# EAGLE board SparkFun_Main_Board_Double_v20-Panel (EAGLE 9.6.2), part 1 of 3
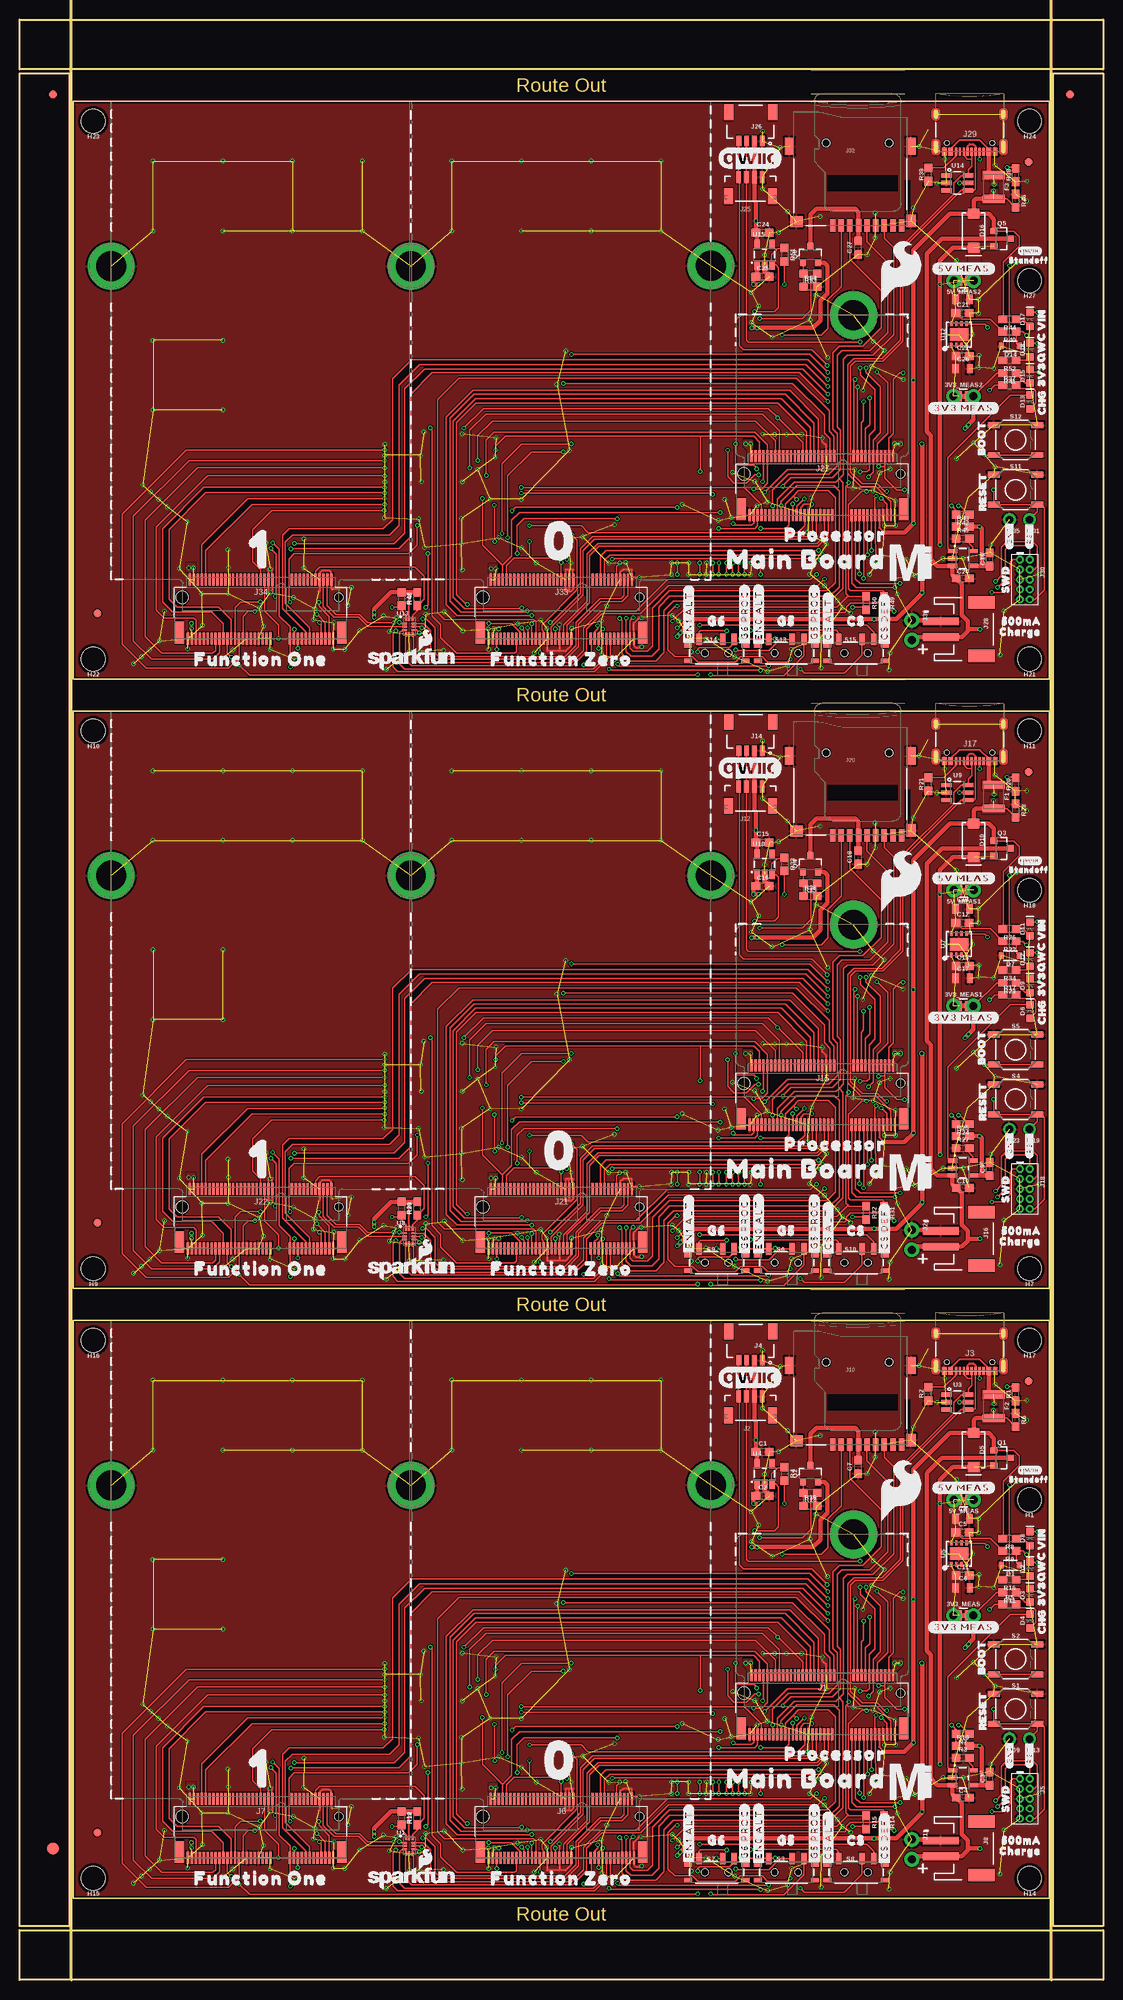
[diagram p0: board, top side]
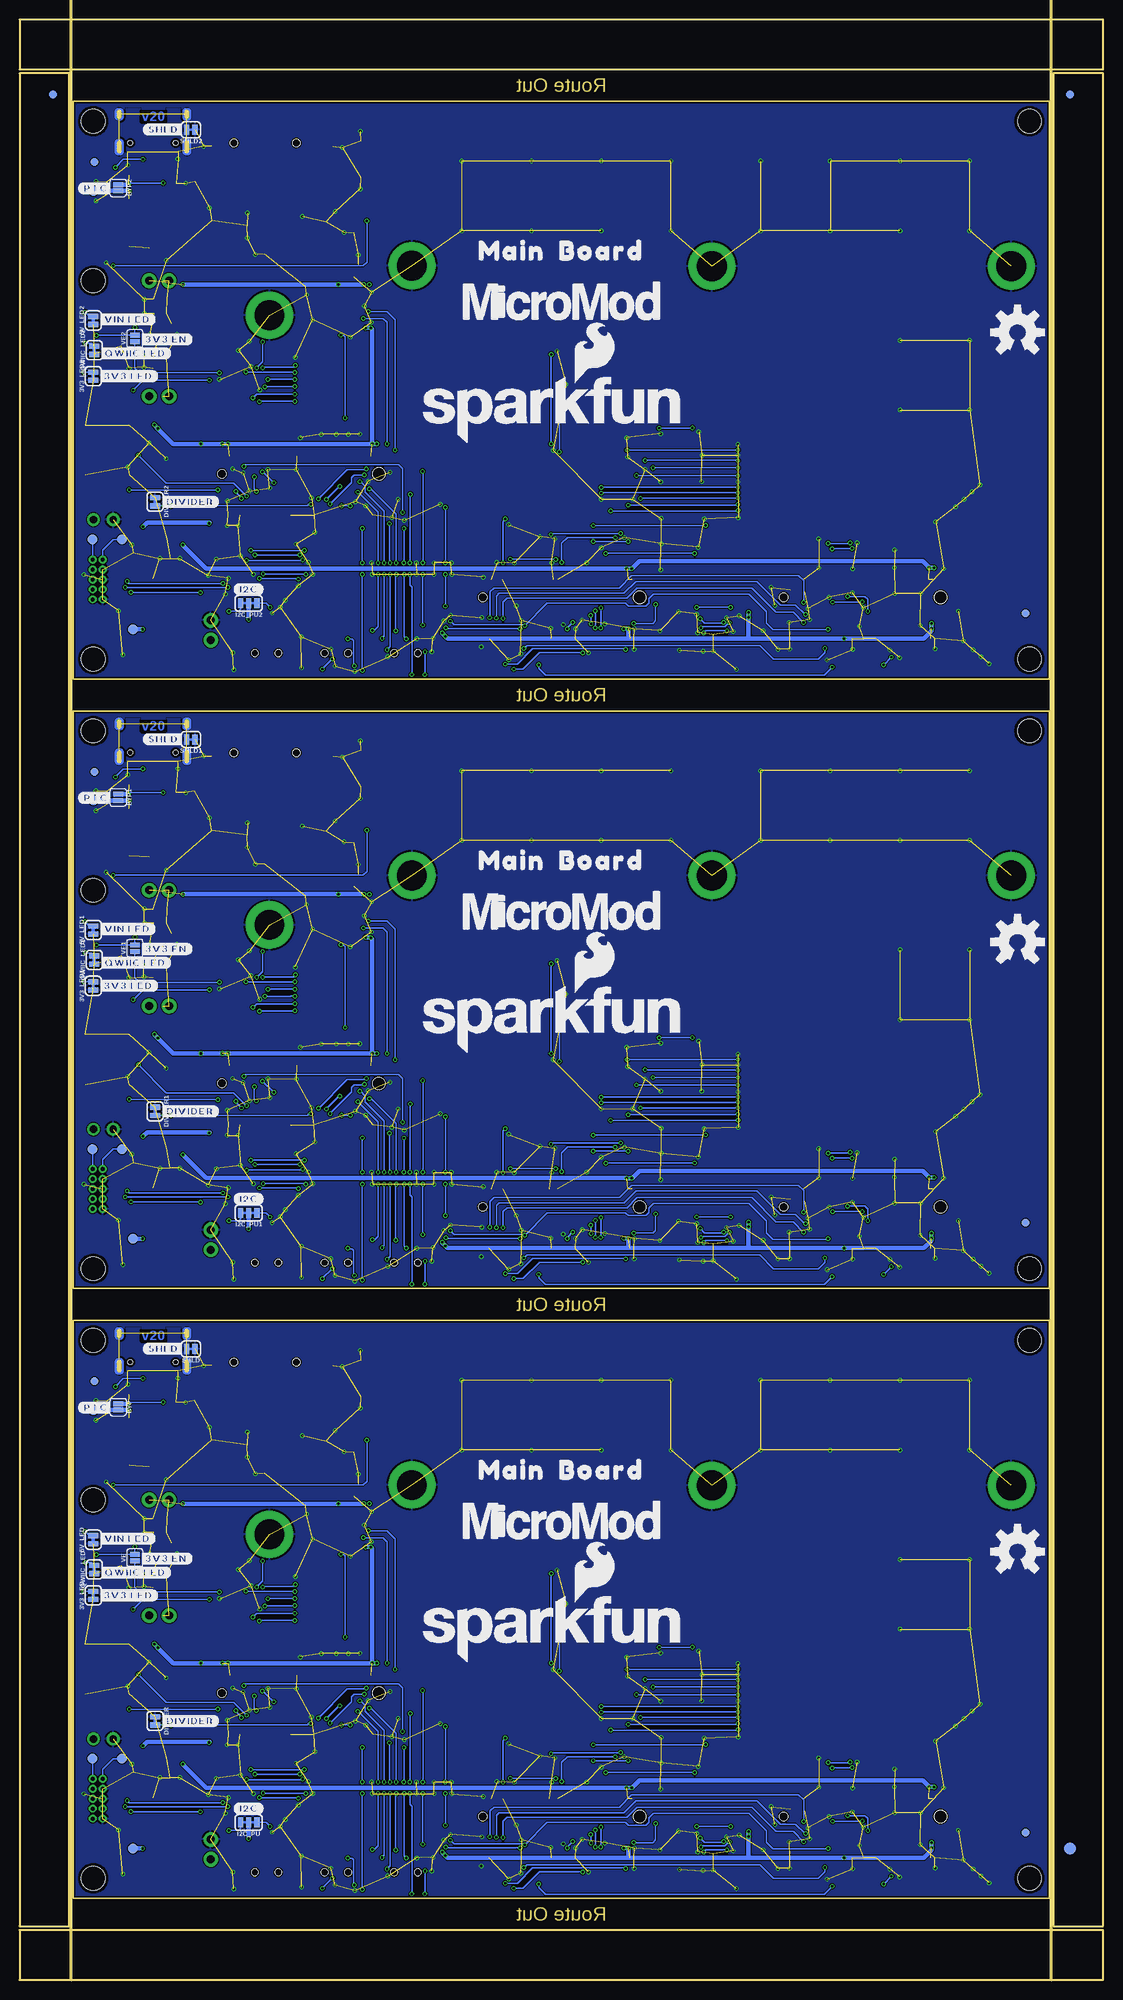
[diagram p1: board, bottom side, seen from below]

Size 138.18 x 249.94 mm. Coordinates in mm from the lower left corner, seen from the top.
Outline: 6.86,84.07 131.32,84.07 131.32,10.41 6.86,10.41 6.86,84.07
Outline: 6.86,161.8 131.32,161.8 131.32,88.14 6.86,88.14 6.86,161.8
Outline: 6.86,239.52 131.32,239.52 131.32,165.86 6.86,165.86 6.86,239.52
Outline: 0,6.35 138.18,6.35 138.18,0 0,0 0,6.35
Outline: 131.83,243.08 138.18,243.08 138.18,6.86 131.83,6.86 131.83,243.08
Outline: 0,249.94 138.18,249.94 138.18,243.59 0,243.59 0,249.94
Outline: 0,243.08 6.35,243.08 6.35,6.86 0,6.86 0,243.08
Copper layers (1*16): Top 0.035mm / dielectric 1.5mm / Bottom 0.035mm
Design rules "SparkFun_Main_Board_Double_v20": minimum track width 5mil, minimum drill 0.3mm, track to track 5mil, track to pad 5mil, pad to pad 5mil, via to via 5mil, smd to smd 5mil, copper to edge 7mil, drill to drill 7mil, minimum pad ring 5mil, minimum via ring 5mil, stop-mask expansion 2.5mil, vias tented up to drill 25mil, thermal gap 10mil
Net classes: 0 default: width 0.178 mm, drill 0.305 mm; 1 POWER: width 0.559 mm, drill 0.305 mm; 2 Diff pairs: width 0.203 mm, drill 0.305 mm
tRestrict: area 31.9,22.9 to 32.1,23.3; area 32.5,22.9 to 32.6,23.3; area 69.8,22.9 to 69.9,23.3; area 70.3,22.9 to 70.4,23.3; area 31.9,100.7 to 32.1,101; area 32.5,100.6 to 32.6,101; area 69.8,100.6 to 69.9,101; area 70.3,100.6 to 70.4,101; area 31.9,178.4 to 32.1,178.8; area 32.5,178.4 to 32.6,178.7; area 69.8,178.4 to 69.9,178.7; area 70.3,178.4 to 70.4,178.7
Milling: 2 lines

## Footprints (pad centres in the part's own frame; a part is rotated, then mirrored left to right if it is on the bottom)
SMT-JUMPER_2_NC_TRACE_SILK = smd 0.66 x 1.27: 1 -0.521,0; 2 0.521,0
COMBO-JUMPER_2_NC_TRACE = smd 0.635 x 1.27: 1 -0.508,0; 2 0.508,0 | drill 1.016 pad 1.88: 3 -1.27,0; 4 1.27,0
SMT-JUMPER_2_NO_SILK = smd 0.635 x 1.27: 1 -0.406,0; 2 0.406,0
0603 = smd 1.1 x 1: 1 -0.85,0; 2 0.85,0
0805 = smd 0.8 x 1.2: 1 -0.9,0; 2 0.9,0
SOD-323 = smd 0.63 x 0.83: A 1.15,0; C -1.15,0
LED-0603 = smd 1 x 1: A -0.877,0; C 0.877,0
SMA-DIODE = smd 1.27 x 1.47: A -2.15,0; C 2.15,0
FIDUCIAL-1X2 = smd 1 x 1: 1 0,0
FIDUCIAL-1.5X3 = smd 1.5 x 1.5: 1 0,0
1210 = smd 1 x 2.8: 1 -1.5,0; 2 1.5,0
STAND-OFF-TIGHT = hole 3.048: 0,0
STAND-OFF-REFLOW-M2.5 = drill 3.8 pad 6: 1 0,0
SMT-JUMPER_3_2-NC_TRACE_SILK = smd 0.66 x 1.27: 1 -1.041,0; 2 0,0; 3 1.041,0
M.2-CONNECTOR-E = smd 0.3 x 1.55: 1 9.25,-5.275; 2 9,2.275; 3 8.75,-5.275; 4 8.5,2.275; 5 8.25,-5.275; 6 8,2.275; 7 7.75,-5.275; 8 7.5,2.275; 9 7.25,-5.275; 10 7,2.275; 11 6.75,-5.275; 12 6.5,2.275; 13 6.25,-5.275; 14 6,2.275; 15 5.75,-5.275; 16 5.5,2.275; 17 5.25,-5.275; 18 5,2.275; 19 4.75,-5.275; 20 4.5,2.275; 21 4.25,-5.275; 22 4,2.275; 23 3.75,-5.275; 32 1.5,2.275; 33 1.25,-5.275; 34 1,2.275; 35 0.75,-5.275; 36 0.5,2.275; 37 0.25,-5.275; 38 0,2.275; 39 -0.25,-5.275; 40 -0.5,2.275; 41 -0.75,-5.275; 42 -1,2.275; 43 -1.25,-5.275; 44 -1.5,2.275; 45 -1.75,-5.275; 46 -2,2.275; 47 -2.25,-5.275; 48 -2.5,2.275; 49 -2.75,-5.275; 50 -3,2.275; 51 -3.25,-5.275; 52 -3.5,2.275; 53 -3.75,-5.275; 54 -4,2.275; 55 -4.25,-5.275; 56 -4.5,2.275; 57 -4.75,-5.275; 58 -5,2.275; 59 -5.25,-5.275; 60 -5.5,2.275; 61 -5.75,-5.275; 62 -6,2.275; 63 -6.25,-5.275; 64 -6.5,2.275; 65 -6.75,-5.275; 66 -7,2.275; 67 -7.25,-5.275; 68 -7.5,2.275; 69 -7.75,-5.275; 70 -8,2.275; 71 -8.25,-5.275; 72 -8.5,2.275; 73 -8.75,-5.275; 74 -9,2.275; 75 -9.25,-5.275 | smd 1.2 x 2.75: A1 10.35,-4.5; A2 -10.35,-4.5 | hole 1.1: 10,0 | hole 1.6: -10,0
JST04_1MM_VERT = smd 0.6 x 1.55: 1 -1.478,0.775; 2 -0.478,0.775; 3 0.522,0.775; 4 1.522,0.775 | smd 1.2 x 2: NC1 -2.778,3.2; NC2 2.822,3.2
USB-C-16P-2LAYER-PADS = smd 0.3 x 1: A5 -1.25,-0.34; A6 -0.25,-0.34; A7 0.25,-0.34; A8 1.25,-0.34; B5 1.75,-0.34; B6 0.75,-0.34; B7 -0.75,-0.34; B8 -1.75,-0.34 | smd 0.6 x 1: GND -3.225,-0.34; GND2 3.225,-0.34; VBUS1 -2.45,-0.34; VBUS2 2.45,-0.34 | drill 0.4 pad 0.6 long: SHLD1 -4.318,-0.915; SHLD2 4.318,-0.915; SHLD3 -4.318,-5.095; SHLD4 4.318,-5.095 | hole 0.65: -2.89,-1.445; 2.89,-1.445
JST04_1MM_RA = smd 0.6 x 1.35: 1 -1.5,0; 2 -0.5,0; 3 0.5,0; 4 1.5,0 | smd 1.2 x 2: NC1 2.8,-3.675; NC2 -2.8,-3.675
2X5-PTH-1.27MM = drill 0.508 pad 1: 1 -2.54,-0.635; 2 -2.54,0.635; 3 -1.27,-0.635; 4 -1.27,0.635; 5 0,-0.635; 6 0,0.635; 7 1.27,-0.635; 8 1.27,0.635; 9 2.54,-0.635; 10 2.54,0.635
M.2-CONNECTOR-E-FUNCTION-STANDARD = smd 0.3 x 1.55: 1 9.25,-5.275; 2 9,2.275; 3 8.75,-5.275; 4 8.5,2.275; 5 8.25,-5.275; 6 8,2.275; 7 7.75,-5.275; 8 7.5,2.275; 9 7.25,-5.275; 10 7,2.275; 11 6.75,-5.275; 12 6.5,2.275; 13 6.25,-5.275; 14 6,2.275; 15 5.75,-5.275; 16 5.5,2.275; 17 5.25,-5.275; 18 5,2.275; 19 4.75,-5.275; 20 4.5,2.275; 21 4.25,-5.275; 22 4,2.275; 23 3.75,-5.275; 32 1.5,2.275; 33 1.25,-5.275; 34 1,2.275; 35 0.75,-5.275; 36 0.5,2.275; 37 0.25,-5.275; 38 0,2.275; 39 -0.25,-5.275; 40 -0.5,2.275; 41 -0.75,-5.275; 42 -1,2.275; 43 -1.25,-5.275; 44 -1.5,2.275; 45 -1.75,-5.275; 46 -2,2.275; 47 -2.25,-5.275; 48 -2.5,2.275; 49 -2.75,-5.275; 50 -3,2.275; 51 -3.25,-5.275; 52 -3.5,2.275; 53 -3.75,-5.275; 54 -4,2.275; 55 -4.25,-5.275; 56 -4.5,2.275; 57 -4.75,-5.275; 58 -5,2.275; 59 -5.25,-5.275; 60 -5.5,2.275; 61 -5.75,-5.275; 62 -6,2.275; 63 -6.25,-5.275; 64 -6.5,2.275; 65 -6.75,-5.275; 66 -7,2.275; 67 -7.25,-5.275; 68 -7.5,2.275; 69 -7.75,-5.275; 70 -8,2.275; 71 -8.25,-5.275; 72 -8.5,2.275; 73 -8.75,-5.275; 74 -9,2.275; 75 -9.25,-5.275 | smd 1.2 x 2.75: A1 10.35,-4.5; A2 -10.35,-4.5 | hole 1.1: 10,0 | hole 1.6: -10,0
JST-2-SMD = smd 1 x 4.6: 1 -1,-3.7; 2 1,-3.7 | smd 1.6 x 3.4: NC1 -3.4,1.5; NC2 3.4,1.5
1X01_NO_SILK = drill 0.95 pad 1.6: 1 0,0
MICROSD-EXTERNALPIN = smd 0.7 x 1.6: 1 2.25,10.5; 2 1.15,10.5; 3 0.05,10.5; 4 -1.05,10.5; 5 -2.15,10.5; 6 -3.25,10.5; 7 -4.35,10.5; 8 -5.45,10.5; 9 -6.55,10.5 | smd 1.2 x 1.6: 10 -7.75,9.9 | smd 1.2 x 2.2: 11 -7.75,0.4; 12 7.75,0.4 | smd 1.6 x 1.4: 13 6.85,10 | hole 1: 3.05,0; -4.95,0
1X02_NO_SILK = drill 1.016 pad 1.88: 1 0,0; 2 2.54,0
SOT23-3 = smd 0.8 x 0.9: 1 -0.95,-1; 2 0.95,-1; 3 0,1.1
TACTILE_SWITCH_SMD_5.2MM = smd 1.524 x 0.762: 1 -2.794,1.905; 2 2.794,1.905; 3 -2.794,-1.905; 4 2.794,-1.905
SWITCH_SPST_SMD_A = smd 0.7 x 1.5: 1 -2.25,-1.75; 2 -0.75,-1.75; 3 2.25,-1.75 | smd 1 x 0.6: GND1 -3.65,1; GND3 3.65,1 | smd 1 x 0.8: GND2 -3.65,-1.1; GND4 3.65,-1.1 | hole 0.9: -1.5,0; 1.5,0
PAD.03X.05 = smd 1.27 x 1.27: 1 0,0
STG3856 = smd 0.6 x 0.25: P1 -0.59,0.41; P2 -0.59,0.01; P3 -0.59,-0.39; P7 0.58,-0.39; P8 0.58,0.01; P9 0.58,0.41 | smd 0.25 x 0.6: P4 -0.42,-0.96; P5 -0.02,-0.96; P6 0.38,-0.96; P10 0.38,1.01; P11 -0.02,1.01; P12 -0.42,1.01
SOT23-5 = smd 0.55 x 1.2: 1 -0.95,-1.3; 2 0,-1.3; 3 0.95,-1.3; 4 0.95,1.3; 5 -0.95,1.3
SOT-23-6 = smd 0.55 x 1.35: 1 -0.95,-1.375; 2 0,-1.375; 3 0.95,-1.375; 4 0.95,1.375; 5 0,1.375; 6 -0.95,1.375
SOT25 = smd 0.7 x 1.2: 1 -0.95,-1.3; 2 0,-1.3; 3 0.95,-1.3; 4 0.95,1.3; 5 -0.95,1.3
UDFN-8 = smd 0.3 x 0.65: 1 -0.975,-1.375; 2 -0.325,-1.375; 3 0.325,-1.375; 4 0.975,-1.375; 5 0.975,1.375; 6 0.325,1.375; 7 -0.325,1.375; 8 -0.975,1.375 | smd 2.35 x 1.6: EP 0,0

## Placement (x,y rotation side)
3V3_LED  JUMPER-SMT_2_NC_TRACE_SILK  [SMT-JUMPER_2_NC_TRACE_SILK]  128.78,49.02 90 bottom
3V3_LED1  JUMPER-SMT_2_NC_TRACE_SILK  [SMT-JUMPER_2_NC_TRACE_SILK]  128.78,126.75 90 bottom
3V3_LED2  JUMPER-SMT_2_NC_TRACE_SILK  [SMT-JUMPER_2_NC_TRACE_SILK]  128.78,204.47 90 bottom
3V3_MEAS  JUMPER-COMBO_2_NC_TRACE  [COMBO-JUMPER_2_NC_TRACE]  120.37,46.46 0 top
3V3_MEAS1  JUMPER-COMBO_2_NC_TRACE  [COMBO-JUMPER_2_NC_TRACE]  120.37,124.18 0 top
3V3_MEAS2  JUMPER-COMBO_2_NC_TRACE  [COMBO-JUMPER_2_NC_TRACE]  120.37,201.9 0 top
5V_LED  JUMPER-SMT_2_NC_TRACE_SILK  [SMT-JUMPER_2_NC_TRACE_SILK]  128.78,56.13 90 bottom
5V_LED1  JUMPER-SMT_2_NC_TRACE_SILK  [SMT-JUMPER_2_NC_TRACE_SILK]  128.78,133.86 90 bottom
5V_LED2  JUMPER-SMT_2_NC_TRACE_SILK  [SMT-JUMPER_2_NC_TRACE_SILK]  128.78,211.58 90 bottom
5V_MEAS  JUMPER-COMBO_2_NC_TRACE  [COMBO-JUMPER_2_NC_TRACE]  120.4,61.21 180 top
5V_MEAS1  JUMPER-COMBO_2_NC_TRACE  [COMBO-JUMPER_2_NC_TRACE]  120.4,138.94 180 top
5V_MEAS2  JUMPER-COMBO_2_NC_TRACE  [COMBO-JUMPER_2_NC_TRACE]  120.4,216.66 180 top
BYP  JUMPER-SMT_2_NO_SILK  [SMT-JUMPER_2_NO_SILK]  125.63,73.05 270 bottom
BYP1  JUMPER-SMT_2_NO_SILK  [SMT-JUMPER_2_NO_SILK]  125.63,150.77 270 bottom
BYP2  JUMPER-SMT_2_NO_SILK  [SMT-JUMPER_2_NO_SILK]  125.63,228.5 270 bottom
C1  1.0uF  [0603]  94.74,67.31 0 top
C2  1.0uF  [0603]  94.74,61.72 0 top
C3  4.7uF  [0603]  123.7,25.65 90 top
C4  4.7uF  [0603]  120.27,23.24 0 top
C5  0.1uF  [0603]  120.24,57.05 0 top
C6  10uF  [0805]  120.27,49.99 0 top
C7  10uF  [0603]  106.93,65.41 90 top
C8  10uF  [0805]  120.24,58.83 0 top
C9  4.7uF  [0603]  123.7,103.38 90 top
C10  4.7uF  [0603]  120.27,100.97 0 top
C11  4.7uF  [0603]  120.27,51.56 0 top
C12  0.1uF  [0603]  120.24,134.77 0 top
C13  4.7uF  [0603]  120.27,129.29 0 top
C14  10uF  [0805]  120.24,136.55 0 top
C15  1.0uF  [0603]  94.74,145.03 0 top
C16  1.0uF  [0603]  94.74,139.45 0 top
C17  10uF  [0805]  120.27,127.71 0 top
C18  10uF  [0603]  106.93,143.13 90 top
C19  4.7uF  [0603]  123.7,181.1 90 top
C20  4.7uF  [0603]  120.27,178.69 0 top
C21  0.1uF  [0603]  120.24,212.5 0 top
C22  4.7uF  [0603]  120.27,207.01 0 top
C23  10uF  [0805]  120.24,214.27 0 top
C24  1.0uF  [0603]  94.74,222.76 0 top
C25  1.0uF  [0603]  94.74,217.17 0 top
C26  10uF  [0805]  120.27,205.44 0 top
C27  10uF  [0603]  106.93,220.85 90 top
D1  3.3V  [SOD-323]  126.34,52.86 180 top
D2  RED  [LED-0603]  128.85,52.36 90 top
D3  RED  [LED-0603]  128.85,49.02 90 top
D4  Yellow  [LED-0603]  128.85,45.76 90 top
D5  3A/40V/500mV  [SMA-DIODE]  121.67,67.56 270 top
D6  Yellow  [LED-0603]  128.85,123.48 90 top
D7  3.3V  [SOD-323]  126.34,130.58 180 top
D8  RED  [LED-0603]  128.85,56.26 90 top
D9  RED  [LED-0603]  128.85,126.74 90 top
D10  3A/40V/500mV  [SMA-DIODE]  121.67,145.29 270 top
D11  RED  [LED-0603]  128.85,133.98 90 top
D12  RED  [LED-0603]  128.85,130.09 90 top
D13  Yellow  [LED-0603]  128.85,201.21 90 top
D14  3.3V  [SOD-323]  126.34,208.31 180 top
D15  RED  [LED-0603]  128.85,204.47 90 top
D16  3A/40V/500mV  [SMA-DIODE]  121.67,223.01 270 top
D17  RED  [LED-0603]  128.85,211.71 90 top
D18  RED  [LED-0603]  128.85,207.81 90 top
DIVIDER  JUMPER-SMT_2_NC_TRACE_SILK  [SMT-JUMPER_2_NC_TRACE_SILK]  120.9,33.02 270 bottom
DIVIDER1  JUMPER-SMT_2_NC_TRACE_SILK  [SMT-JUMPER_2_NC_TRACE_SILK]  120.9,110.74 270 bottom
DIVIDER2  JUMPER-SMT_2_NC_TRACE_SILK  [SMT-JUMPER_2_NC_TRACE_SILK]  120.9,188.47 270 bottom
E$1  [FIDUCIAL-1X2]  4.23,240.41 0 top
E$2  [FIDUCIAL-1X2]  4.23,240.41 0 bottom
E$3  [FIDUCIAL-1X2]  133.94,240.41 0 top
E$4  [FIDUCIAL-1X2]  133.94,240.41 0 bottom
E$5  [FIDUCIAL-1.5X3]  4.23,16.76 0 top
E$6  [FIDUCIAL-1.5X3]  4.23,16.76 0 bottom
F1  6V/2A  [1210]  124.21,150.88 270 top
F2  6V/2A  [1210]  124.21,73.15 270 top
F3  6V/2A  [1210]  124.21,228.6 270 top
FD1  FIDUCIAL1X2  [FIDUCIAL-1X2]  9.91,18.8 180 bottom
FD2  FIDUCIAL1X2  [FIDUCIAL-1X2]  9.91,18.8 180 top
FD3  FIDUCIAL1X2  [FIDUCIAL-1X2]  128.65,76.33 270 top
FD4  FIDUCIAL1X2  [FIDUCIAL-1X2]  128.65,76.33 90 bottom
FD5  FIDUCIAL1X2  [FIDUCIAL-1X2]  9.91,96.52 180 bottom
FD6  FIDUCIAL1X2  [FIDUCIAL-1X2]  9.91,96.52 180 top
FD7  FIDUCIAL1X2  [FIDUCIAL-1X2]  128.65,154.05 270 top
FD8  FIDUCIAL1X2  [FIDUCIAL-1X2]  128.65,154.05 90 bottom
FD9  FIDUCIAL1X2  [FIDUCIAL-1X2]  9.91,174.24 180 bottom
FD10  FIDUCIAL1X2  [FIDUCIAL-1X2]  9.91,174.24 180 top
FD11  FIDUCIAL1X2  [FIDUCIAL-1X2]  128.65,231.77 270 top
FD12  FIDUCIAL1X2  [FIDUCIAL-1X2]  128.65,231.77 90 bottom
H1  STAND-OFFTIGHT  [STAND-OFF-TIGHT]  128.78,61.21 180 top
H2  STAND-OFF-REFLOW-M2.5_2.5MM_TALL  [STAND-OFF-REFLOW-M2.5]  49.89,63.07 180 top
H3  STAND-OFF-REFLOW-M2.5_2.5MM_TALL  [STAND-OFF-REFLOW-M2.5]  11.7,63.07 90 top
H4  STAND-OFF-REFLOW-M2.5_2.5MM_TALL  [STAND-OFF-REFLOW-M2.5]  88.15,63.09 90 top
H5  STAND-OFF-REFLOW-M2.5_2.5MM_TALL  [STAND-OFF-REFLOW-M2.5]  11.7,140.79 90 top
H6  STAND-OFF-REFLOW-M2.5_2.5MM_TALL  [STAND-OFF-REFLOW-M2.5]  106.32,134.52 90 top
H7  STAND-OFFTIGHT  [STAND-OFF-TIGHT]  128.78,90.68 180 top
H8  STAND-OFF-REFLOW-M2.5_2.5MM_TALL  [STAND-OFF-REFLOW-M2.5]  106.32,56.8 90 top
H9  STAND-OFFTIGHT  [STAND-OFF-TIGHT]  9.4,90.68 180 top
H10  STAND-OFFTIGHT  [STAND-OFF-TIGHT]  9.4,159.26 180 top
H11  STAND-OFFTIGHT  [STAND-OFF-TIGHT]  128.78,159.26 180 top
H12  STAND-OFF-REFLOW-M2.5_2.5MM_TALL  [STAND-OFF-REFLOW-M2.5]  49.89,140.79 180 top
H13  STAND-OFF-REFLOW-M2.5_2.5MM_TALL  [STAND-OFF-REFLOW-M2.5]  88.15,140.82 90 top
H14  STAND-OFFTIGHT  [STAND-OFF-TIGHT]  128.78,12.95 180 top
H15  STAND-OFFTIGHT  [STAND-OFF-TIGHT]  9.4,12.95 180 top
H16  STAND-OFFTIGHT  [STAND-OFF-TIGHT]  9.4,81.53 180 top
H17  STAND-OFFTIGHT  [STAND-OFF-TIGHT]  128.78,81.53 180 top
H18  STAND-OFFTIGHT  [STAND-OFF-TIGHT]  128.78,138.94 180 top
H19  STAND-OFF-REFLOW-M2.5_2.5MM_TALL  [STAND-OFF-REFLOW-M2.5]  11.7,218.52 90 top
H20  STAND-OFF-REFLOW-M2.5_2.5MM_TALL  [STAND-OFF-REFLOW-M2.5]  106.32,212.25 90 top
H21  STAND-OFFTIGHT  [STAND-OFF-TIGHT]  128.78,168.4 180 top
H22  STAND-OFFTIGHT  [STAND-OFF-TIGHT]  9.4,168.4 180 top
H23  STAND-OFFTIGHT  [STAND-OFF-TIGHT]  9.4,236.98 180 top
H24  STAND-OFFTIGHT  [STAND-OFF-TIGHT]  128.78,236.98 180 top
H25  STAND-OFF-REFLOW-M2.5_2.5MM_TALL  [STAND-OFF-REFLOW-M2.5]  49.89,218.52 180 top
H26  STAND-OFF-REFLOW-M2.5_2.5MM_TALL  [STAND-OFF-REFLOW-M2.5]  88.15,218.54 90 top
H27  STAND-OFFTIGHT  [STAND-OFF-TIGHT]  128.78,216.66 180 top
I2C_PU  JUMPER-SMT_3_2-NC_TRACE_SILK  [SMT-JUMPER_3_2-NC_TRACE_SILK]  108.97,20.07 180 bottom
I2C_PU1  JUMPER-SMT_3_2-NC_TRACE_SILK  [SMT-JUMPER_3_2-NC_TRACE_SILK]  108.97,97.79 180 bottom
I2C_PU2  JUMPER-SMT_3_2-NC_TRACE_SILK  [SMT-JUMPER_3_2-NC_TRACE_SILK]  108.97,175.51 180 bottom
J1  MICROMOD-2222-C  [M.2-CONNECTOR-E]  102.36,36.58 0 top
J2  Vertical Qwiic Connector  [JST04_1MM_VERT]  93.22,75.18 180 top
J3  [USB-C-16P-2LAYER-PADS]  121.16,77.32 180 top
J4  QWIIC_RIGHT_ANGLE  [JST04_1MM_RA]  93.22,78.99 180 top
J5  CORTEX_JTAG_DEBUG_MINIMUM_PTH  [2X5-PTH-1.27MM]  128.21,23.11 270 top
J6  MICROMOD_FUNCTION_MAIN  [M.2-CONNECTOR-E-FUNCTION-STANDARD]  69.09,20.83 0 top
J7  MICROMOD_FUNCTION_MAIN  [M.2-CONNECTOR-E-FUNCTION-STANDARD]  30.73,20.83 0 top
J8  [JST-2-SMD]  121.16,16.76 270 top
J9  [1X01_NO_SILK]  126.24,30.73 180 top
J10  MICRO-SD-PUSH-PUSH-EXT-PIN  [MICROSD-EXTERNALPIN]  105.92,78.74 180 top
J11  [1X02_NO_SILK]  113.79,17.91 270 top
J12  Vertical Qwiic Connector  [JST04_1MM_VERT]  93.22,152.91 180 top
J13  [1X01_NO_SILK]  128.78,30.73 180 top
J14  QWIIC_RIGHT_ANGLE  [JST04_1MM_RA]  93.22,156.72 180 top
J15  MICROMOD-2222-C  [M.2-CONNECTOR-E]  102.36,114.3 0 top
J16  [JST-2-SMD]  121.16,94.49 270 top
J17  [USB-C-16P-2LAYER-PADS]  121.16,155.04 180 top
J18  CORTEX_JTAG_DEBUG_MINIMUM_PTH  [2X5-PTH-1.27MM]  128.21,100.83 270 top
J19  [1X01_NO_SILK]  128.78,108.46 180 top
J20  MICRO-SD-PUSH-PUSH-EXT-PIN  [MICROSD-EXTERNALPIN]  105.92,156.46 180 top
J21  MICROMOD_FUNCTION_MAIN  [M.2-CONNECTOR-E-FUNCTION-STANDARD]  69.09,98.55 0 top
J22  MICROMOD_FUNCTION_MAIN  [M.2-CONNECTOR-E-FUNCTION-STANDARD]  30.73,98.55 0 top
J23  [1X01_NO_SILK]  126.24,108.46 180 top
J24  [1X02_NO_SILK]  113.79,95.63 270 top
J25  Vertical Qwiic Connector  [JST04_1MM_VERT]  93.22,230.63 180 top
J26  QWIIC_RIGHT_ANGLE  [JST04_1MM_RA]  93.22,234.44 180 top
J27  MICROMOD-2222-C  [M.2-CONNECTOR-E]  102.36,192.02 0 top
J28  [JST-2-SMD]  121.16,172.21 270 top
J29  [USB-C-16P-2LAYER-PADS]  121.16,232.77 180 top
J30  CORTEX_JTAG_DEBUG_MINIMUM_PTH  [2X5-PTH-1.27MM]  128.21,178.56 270 top
J31  [1X01_NO_SILK]  128.78,186.18 180 top
J32  MICRO-SD-PUSH-PUSH-EXT-PIN  [MICROSD-EXTERNALPIN]  105.92,234.19 180 top
J33  MICROMOD_FUNCTION_MAIN  [M.2-CONNECTOR-E-FUNCTION-STANDARD]  69.09,176.28 0 top
J34  MICROMOD_FUNCTION_MAIN  [M.2-CONNECTOR-E-FUNCTION-STANDARD]  30.73,176.28 0 top
J35  [1X01_NO_SILK]  126.24,186.18 180 top
J36  [1X02_NO_SILK]  113.79,173.35 270 top
LOGO1  QWIIC_LOGO_8MM  [QWIIC_8MM]  93.17,76.78 0 top
LOGO2  SFE_LOGO_NAME_FLAME.3_INCH  [SFE_LOGO_NAME_FLAME_.3]  70.36,44.7 0 bottom
LOGO3  OSHW-LOGOL  [OSHW-LOGO-L]  10.92,54.61 0 bottom
LOGO4  QWIIC_LOGO_8MM  [QWIIC_8MM]  93.17,154.51 0 top
LOGO5  SFE_LOGO_NAME_FLAME.3_INCH  [SFE_LOGO_NAME_FLAME_.3]  70.36,122.43 0 bottom
LOGO6  OSHW-LOGOL  [OSHW-LOGO-L]  10.92,132.33 0 bottom
LOGO7  QWIIC_LOGO_8MM  [QWIIC_8MM]  93.17,232.23 0 top
LOGO8  SFE_LOGO_NAME_FLAME.3_INCH  [SFE_LOGO_NAME_FLAME_.3]  70.36,200.15 0 bottom
LOGO9  OSHW-LOGOL  [OSHW-LOGO-L]  10.92,210.06 0 bottom
Q1  3.1A/30V/105mΩ  [SOT23-3]  125.22,66.55 270 top
Q2  20V/4.2A/52mΩ/1.4W  [SOT23-3]  100.84,64.52 0 top
Q3  3.1A/30V/105mΩ  [SOT23-3]  125.22,144.27 270 top
Q4  20V/4.2A/52mΩ/1.4W  [SOT23-3]  100.84,142.24 0 top
Q5  3.1A/30V/105mΩ  [SOT23-3]  125.22,222 270 top
Q6  20V/4.2A/52mΩ/1.4W  [SOT23-3]  100.84,219.96 0 top
QWIIC_LED  JUMPER-SMT_2_NC_TRACE_SILK  [SMT-JUMPER_2_NC_TRACE_SILK]  128.65,52.32 90 bottom
QWIIC_LED1  JUMPER-SMT_2_NC_TRACE_SILK  [SMT-JUMPER_2_NC_TRACE_SILK]  128.65,130.05 90 bottom
QWIIC_LED2  JUMPER-SMT_2_NC_TRACE_SILK  [SMT-JUMPER_2_NC_TRACE_SILK]  128.65,207.77 90 bottom
R1  5.1k  [0603]  127,74.68 90 top
R2  5.1k  [0603]  115.87,74.73 90 top
R3  2.0k  [0603]  120.27,28.32 0 top
R4  100k  [0603]  97.54,64.52 270 top
R5  4.7k  [0603]  126.24,47.88 0 top
R6  10k  [0603]  127,71.37 270 top
R7  10k  [0603]  120.27,31.37 180 top
R8  2.2k  [0603]  126.24,56.26 180 top
R9  100k  [0603]  126.24,54.7 180 top
R10  20k  [0603]  120.27,29.84 0 top
R11  1k  [0603]  126.24,49.4 180 top
R12  100k  [0603]  50.72,20.62 90 top
R13  100k  [0603]  48.69,20.62 270 top
R14  2.2k  [0603]  110.24,20.07 270 top
R15  2.2k  [0603]  107.95,20.07 270 top
R16  1k  [0603]  126.24,51.04 180 top
R17  4.7k  [0603]  126.24,125.6 0 top
R18  100  [0603]  100.84,62.09 180 top
R19  100k  [0603]  100.83,60.45 0 top
R20  5.1k  [0603]  127,152.4 90 top
R21  5.1k  [0603]  115.87,152.45 90 top
R22  100k  [0603]  126.24,132.42 180 top
R23  1k  [0603]  126.24,127.13 180 top
R24  10k  [0603]  120.27,109.09 180 top
R25  20k  [0603]  120.27,107.57 0 top
R26  2.2k  [0603]  126.24,133.98 180 top
R27  2.0k  [0603]  120.27,106.05 0 top
R28  10k  [0603]  127,149.1 270 top
R29  100k  [0603]  50.72,98.35 90 top
R30  100k  [0603]  48.69,98.35 270 top
R31  2.2k  [0603]  110.24,97.79 270 top
R32  2.2k  [0603]  107.95,97.79 270 top
R33  100k  [0603]  97.54,142.24 270 top
R34  1k  [0603]  126.24,128.76 180 top
R35  100  [0603]  100.84,139.81 180 top
R36  100k  [0603]  100.83,138.18 0 top
R37  4.7k  [0603]  126.24,203.33 0 top
R38  5.1k  [0603]  127,230.12 90 top
R39  5.1k  [0603]  115.87,230.17 90 top
R40  100k  [0603]  126.24,210.14 180 top
R41  1k  [0603]  126.24,204.85 180 top
R42  10k  [0603]  120.27,186.82 180 top
R43  20k  [0603]  120.27,185.29 0 top
R44  2.2k  [0603]  126.24,211.71 180 top
R45  2.0k  [0603]  120.27,183.77 0 top
R46  10k  [0603]  127,226.82 270 top
R47  100k  [0603]  50.72,176.07 90 top
R48  100k  [0603]  48.69,176.07 270 top
R49  2.2k  [0603]  110.24,175.51 270 top
R50  2.2k  [0603]  107.95,175.51 270 top
R51  100k  [0603]  97.54,219.96 270 top
R52  1k  [0603]  126.24,206.49 180 top
R53  100  [0603]  100.84,217.53 180 top
R54  100k  [0603]  100.83,215.9 0 top
S1  Reset  [TACTILE_SWITCH_SMD_5.2MM]  127,34.54 0 top
S2  BOOT  [TACTILE_SWITCH_SMD_5.2MM]  127,40.89 0 top
S3  [SWITCH_SPST_SMD_A]  97.79,13.72 180 top
S4  Reset  [TACTILE_SWITCH_SMD_5.2MM]  127,112.27 0 top
S5  BOOT  [TACTILE_SWITCH_SMD_5.2MM]  127,118.62 0 top
S6  [SWITCH_SPST_SMD_A]  97.79,91.44 180 top
S7  [SWITCH_SPST_SMD_A]  88.9,13.72 180 top
S8  [SWITCH_SPST_SMD_A]  106.68,13.72 180 top
S9  [SWITCH_SPST_SMD_A]  88.9,91.44 180 top
S10  [SWITCH_SPST_SMD_A]  106.68,91.44 180 top
S11  Reset  [TACTILE_SWITCH_SMD_5.2MM]  127,189.99 0 top
S12  BOOT  [TACTILE_SWITCH_SMD_5.2MM]  127,196.34 0 top
S13  [SWITCH_SPST_SMD_A]  97.79,169.16 180 top
S14  [SWITCH_SPST_SMD_A]  88.9,169.16 180 top
S15  [SWITCH_SPST_SMD_A]  106.68,169.16 180 top
SHLD  JUMPER-SMT_2_NC_TRACE_SILK  [SMT-JUMPER_2_NC_TRACE_SILK]  116.33,80.44 180 bottom
SHLD1  JUMPER-SMT_2_NC_TRACE_SILK  [SMT-JUMPER_2_NC_TRACE_SILK]  116.33,158.17 180 bottom
SHLD2  JUMPER-SMT_2_NC_TRACE_SILK  [SMT-JUMPER_2_NC_TRACE_SILK]  116.33,235.89 180 bottom
TP1  TEST-POINT3X5  [PAD.03X.05]  128.87,28.22 180 bottom
TP2  TEST-POINT3X5  [PAD.03X.05]  125.15,28.21 0 bottom
TP3  TEST-POINT3X5  [PAD.03X.05]  123.7,16.76 90 bottom
TP4  TEST-POINT3X5  [PAD.03X.05]  128.78,72.64 180 bottom
TP5  TEST-POINT3X5  [PAD.03X.05]  125.15,105.93 0 bottom
TP6  TEST-POINT3X5  [PAD.03X.05]  123.7,94.49 90 bottom
TP7  TEST-POINT3X5  [PAD.03X.05]  128.78,150.37 180 bottom
TP8  TEST-POINT3X5  [PAD.03X.05]  128.87,105.94 180 bottom
TP9  TEST-POINT3X5  [PAD.03X.05]  125.15,183.65 0 bottom
TP10  TEST-POINT3X5  [PAD.03X.05]  123.7,172.21 90 bottom
TP11  TEST-POINT3X5  [PAD.03X.05]  128.78,228.09 180 bottom
TP12  TEST-POINT3X5  [PAD.03X.05]  128.87,183.66 180 bottom
U1  STG3856QTR  [STG3856]  49.71,17.07 0 top
U2  MCP73831  [SOT23-5]  120.27,25.78 270 top
U3  ESD Diode  [SOT-23-6]  119.58,73.66 270 top
U4  AP7347DQ-33W5-7K-3.3V  [SOT25]  95,64.52 0 top
U5  AP7361C-33  [UDFN-8]  119.79,54.33 0 top
U6  MCP73831  [SOT23-5]  120.27,103.5 270 top
U7  AP7361C-33  [UDFN-8]  119.79,132.05 0 top
U8  STG3856QTR  [STG3856]  49.71,94.79 0 top
U9  ESD Diode  [SOT-23-6]  119.58,151.38 270 top
U10  AP7347DQ-33W5-7K-3.3V  [SOT25]  95,142.24 0 top
U11  MCP73831  [SOT23-5]  120.27,181.23 270 top
U12  AP7361C-33  [UDFN-8]  119.79,209.78 0 top
U13  STG3856QTR  [STG3856]  49.71,172.52 0 top
U14  ESD Diode  [SOT-23-6]  119.58,229.11 270 top
U15  AP7347DQ-33W5-7K-3.3V  [SOT25]  95,219.96 0 top
U$1  [#3V3_LED#22]  124.33,49.02 0 bottom
U$2  [#3V3_EN#23]  119.51,53.72 0 bottom
U$3  [#PTC#503]  128.47,72.97 0 bottom
U$4  [3V332533]  130.34,49.25 90 top
U$5  [VIN32532]  130.33,56.18 90 top
U$6  [CHG32531]  130.37,45.67 90 top
U$7  [#SHLD#501]  119.84,80.47 0 bottom
U$8  [BOOT32541]  122.68,41.15 90 top
U$9  [RESET32540]  122.81,34.29 90 top
U$10  [PROCESSOR525]  104.01,28.83 0 top
U$11  [FUNCTION_ZERO520]  69.09,12.95 0 top
U$12  [FUNCTION_ONE524]  30.73,12.95 0 top
U$13  [MAIN523]  75.44,65.02 0 bottom
U$14  [MICROMOD_MI_LOGO_1]  113.67,25.27 0 top
U$15  [0523]  69.09,27.94 0 top
U$16  [1524]  30.73,26.92 0 top
U$17  [MICROMOD_LOGO_1]  69.09,58.67 0 bottom
U$18  [BOARD524]  64.01,65.02 0 bottom
U$19  [G518]  97.79,17.78 0 top
U$20  [#CS_ALT#20]  103.1,18.01 90 top
U$21  [MAIN_BOARD5523]  100.33,25.68 0 top
U$22  [QWIIC_3MM]  128.83,64.97 0 top
U$23  [STANDOFF501]  128.7,63.8 0 top
U$24  [SFE_LOGO_FLAME_.3]  112.45,62.33 0 top
U$25  [SWD6522]  125.73,23.11 90 top
U$26  [#3V3_MEAS#6522]  120.37,44.96 0 top
U$27  [CHARGE501]  127.58,16.43 0 top
U$28  [#QWIIC_LED#22]  123.44,51.94 0 bottom
U$29  [G6519]  88.9,17.78 0 top
U$30  [#I2C#501]  108.97,21.84 0 bottom
U$31  [#5V_MEAS#6522]  120.4,62.74 0 top
U$32  [CS17]  106.68,17.78 0 top
U$33  [500MA6520]  127.76,17.78 0 top
U$34  [#CS_DEF#19]  110.29,17.93 90 top
U$35  [#G5_PROC#21]  101.35,18.54 90 top
U$36  [#G6_PROC#21]  92.46,18.54 90 top
U$37  [#EN0_ALT#21]  94.23,18.54 90 top
U$38  [#EN1_ALT#21]  85.34,18.54 90 top
U$39  [#RST#6521]  128.78,28.7 90 top
U$40  [#GND#6520]  126.24,28.7 90 top
U$41  [#DIVIDER#23]  116.46,33.02 0 bottom
U$42  [#VIN_LED#24]  124.46,56.26 0 bottom
U$43  [QWC18]  130.3,52.7 90 top
U$44  [SFE_LOGO_NAME_FLAME_.1]  50.04,12.95 0 top
U$45  [3V332533]  130.34,126.97 90 top
U$46  [VIN32532]  130.33,133.91 90 top
U$47  [CHG32531]  130.37,123.39 90 top
U$48  [BOOT32541]  122.68,118.87 90 top
U$49  [RESET32540]  122.81,112.01 90 top
U$50  [PROCESSOR525]  104.01,106.55 0 top
U$51  [FUNCTION_ZERO520]  69.09,90.68 0 top
U$52  [FUNCTION_ONE524]  30.73,90.68 0 top
U$53  [MICROMOD_MI_LOGO_1]  113.67,103 0 top
U$54  [0523]  69.09,105.66 0 top
U$55  [1524]  30.73,104.65 0 top
U$56  [MAIN523]  75.44,142.75 0 bottom
U$57  [BOARD524]  64.01,142.75 0 bottom
U$58  [MAIN_BOARD5523]  100.33,103.4 0 top
U$59  [MICROMOD_LOGO_1]  69.09,136.4 0 bottom
U$60  [QWIIC_3MM]  128.83,142.7 0 top
U$61  [STANDOFF501]  128.7,141.53 0 top
U$62  [SFE_LOGO_FLAME_.3]  112.45,140.06 0 top
U$63  [#CS_ALT#20]  103.1,95.73 90 top
U$64  [#CS_DEF#19]  110.29,95.66 90 top
U$65  [#G5_PROC#21]  101.35,96.27 90 top
U$66  [#G6_PROC#21]  92.46,96.27 90 top
U$67  [#EN0_ALT#21]  94.23,96.27 90 top
U$68  [#EN1_ALT#21]  85.34,96.27 90 top
U$69  [CHARGE501]  127.58,94.16 0 top
U$70  [#PTC#503]  128.47,150.7 0 bottom
U$71  [#SHLD#501]  119.84,158.19 0 bottom
U$72  [#I2C#501]  108.97,99.57 0 bottom
U$73  [#3V3_MEAS#6522]  120.37,122.68 0 top
U$74  [#5V_MEAS#6522]  120.4,140.46 0 top
U$75  [500MA6520]  127.76,95.5 0 top
U$76  [#RST#6521]  128.78,106.43 90 top
U$77  [#GND#6520]  126.24,106.43 90 top
U$78  [G518]  97.79,95.5 0 top
U$79  [G6519]  88.9,95.5 0 top
U$80  [CS17]  106.68,95.5 0 top
U$81  [SWD6522]  125.73,100.84 90 top
U$82  [#3V3_EN#23]  119.51,131.44 0 bottom
U$83  [#3V3_LED#22]  124.33,126.75 0 bottom
U$84  [#QWIIC_LED#22]  123.44,129.67 0 bottom
U$85  [#DIVIDER#23]  116.46,110.74 0 bottom
U$86  [#VIN_LED#24]  124.46,133.98 0 bottom
U$87  [QWC18]  130.3,130.43 90 top
U$88  [SFE_LOGO_NAME_FLAME_.1]  50.04,90.68 0 top
U$89  [3V332533]  130.34,204.7 90 top
U$90  [VIN32532]  130.33,211.63 90 top
U$91  [CHG32531]  130.37,201.12 90 top
U$92  [BOOT32541]  122.68,196.6 90 top
U$93  [RESET32540]  122.81,189.74 90 top
U$94  [PROCESSOR525]  104.01,184.28 0 top
U$95  [FUNCTION_ZERO520]  69.09,168.4 0 top
U$96  [FUNCTION_ONE524]  30.73,168.4 0 top
U$97  [MICROMOD_MI_LOGO_1]  113.67,180.72 0 top
U$98  [0523]  69.09,183.39 0 top
U$99  [1524]  30.73,182.37 0 top
U$100  [MAIN523]  75.44,220.47 0 bottom
U$101  [BOARD524]  64.01,220.47 0 bottom
U$102  [MAIN_BOARD5523]  100.33,181.13 0 top
U$103  [MICROMOD_LOGO_1]  69.09,214.12 0 bottom
U$104  [QWIIC_3MM]  128.83,220.42 0 top
U$105  [STANDOFF501]  128.7,219.25 0 top
U$106  [SFE_LOGO_FLAME_.3]  112.45,217.78 0 top
U$107  [#CS_ALT#20]  103.1,173.46 90 top
U$108  [#CS_DEF#19]  110.29,173.38 90 top
U$109  [#G5_PROC#21]  101.35,173.99 90 top
U$110  [#G6_PROC#21]  92.46,173.99 90 top
U$111  [#EN0_ALT#21]  94.23,173.99 90 top
U$112  [#EN1_ALT#21]  85.34,173.99 90 top
U$113  [CHARGE501]  127.58,171.88 0 top
U$114  [#PTC#503]  128.47,228.42 0 bottom
U$115  [#SHLD#501]  119.84,235.92 0 bottom
U$116  [#I2C#501]  108.97,177.29 0 bottom
U$117  [#3V3_MEAS#6522]  120.37,200.41 0 top
U$118  [#5V_MEAS#6522]  120.4,218.19 0 top
U$119  [500MA6520]  127.76,173.23 0 top
U$120  [#RST#6521]  128.78,184.15 90 top
U$121  [#GND#6520]  126.24,184.15 90 top
U$122  [G518]  97.79,173.23 0 top
U$123  [G6519]  88.9,173.23 0 top
U$124  [CS17]  106.68,173.23 0 top
U$125  [SWD6522]  125.73,178.56 90 top
U$126  [#3V3_EN#23]  119.51,209.17 0 bottom
U$127  [#3V3_LED#22]  124.33,204.47 0 bottom
U$128  [#QWIIC_LED#22]  123.44,207.39 0 bottom
U$129  [#DIVIDER#23]  116.46,188.47 0 bottom
U$130  [#VIN_LED#24]  124.46,211.71 0 bottom
U$131  [QWC18]  130.3,208.15 90 top
U$132  [SFE_LOGO_NAME_FLAME_.1]  50.04,168.4 0 top
VE  JUMPER-SMT_2_NO_SILK  [SMT-JUMPER_2_NO_SILK]  123.47,53.82 90 bottom
VE1  JUMPER-SMT_2_NO_SILK  [SMT-JUMPER_2_NO_SILK]  123.47,131.55 90 bottom
VE2  JUMPER-SMT_2_NO_SILK  [SMT-JUMPER_2_NO_SILK]  123.47,209.27 90 bottom

## Library data of the parts
3V3_LED 3V3_LED1 3V3_LED2 3V3_MEAS 3V3_MEAS1 3V3_MEAS2 5V_LED 5V_LED1 5V_LED2 5V_MEAS 5V_MEAS1 5V_MEAS2 BYP BYP1 BYP2 DIVIDER DIVIDER1 DIVIDER2 I2C_PU I2C_PU1 I2C_PU2 QWIIC_LED QWIIC_LED1 QWIIC_LED2 SHLD SHLD1 SHLD2 VE VE1 VE2 = SparkFun-Jumpers
C1 C2 C15 C16 C24 C25 = SparkFun-Capacitors; PROD_ID: CAP-00868
C3 C9 C11 C13 C19 C22 = SparkFun-Capacitors; PROD_ID: CAP-08280
C4 C10 C20 = SparkFun-Capacitors; PROD_ID: CAP-14106
C5 C12 C21 = SparkFun-Capacitors; PROD_ID: CAP-00810
C6 C8 C14 C17 C23 C26 = SparkFun-Capacitors; PROD_ID: CAP-11330
C7 C18 C27 = SparkFun-Capacitors; PROD_ID: CAP-11015
D1 D7 D14 = SparkFun-DiscreteSemi; PROD_ID: DIO-11284
D2 D3 D8 D9 D11 D12 D15 D17 D18 = SparkFun-LED; PROD_ID: DIO-00819
D4 D6 D13 = SparkFun-LED; PROD_ID: DIO-09003
D5 D10 D16 = SparkFun-DiscreteSemi; PROD_ID: DIO-09886
E$1-E$4 FD1-FD12 LOGO1-LOGO9 U$22 U$24 U$44 U$60 U$62 U$88 U$104 U$106 U$132 = SparkFun-Aesthetics
E$5 E$6 = SparkFun-Retired
F1-F3 = SparkFun-Fuses; PROD_ID: RES-14313
H1 H7 H9-H11 H14-H18 H21-H24 H27 = SparkFun-Hardware
H2-H6 H8 H12 H13 H19 H20 H25 H26 = SparkFun-Hardware; PROD_ID: HW-14899
J1 J6 J7 J15 J21 J22 J27 J33 J34 = SparkFun-MicroMod; PROD_ID: CONN-14877
J2 J12 J25 = SparkFun-Connectors; PROD_ID: CONN-14483
J3 J17 J29 = SparkFun-Connectors; PROD_ID: CONN-14122
J4 J14 J26 = SparkFun-Connectors; PROD_ID: CONN-13694
J5 J9 J11 J13 J18 J19 J23 J24 J30 J31 J35 J36 TP1-TP12 = SparkFun-Connectors
J8 J16 J28 = SparkFun-Connectors; PROD_ID: CONN-11443; SF_ID: PRT-08612
J10 J20 J32 = SparkFun-Connectors; PROD_ID: CONN-16110
Q1 Q3 Q5 = SparkFun-DiscreteSemi; PROD_ID: TRANS-11308
Q2 Q4 Q6 = SparkFun-DiscreteSemi; PROD_ID: TRANS-14388
R1 R2 R20 R21 R38 R39 = SparkFun-Resistors; PROD_ID: RES-12083
R3 R27 R45 = SparkFun-Resistors; PROD_ID: RES-08296
R4 R9 R12 R13 R19 R22 R29 R30 R33 R36 R40 R47 R48 R51 R54 = SparkFun-Resistors; PROD_ID: RES-07828
R5 R17 R37 = SparkFun-Resistors; PROD_ID: RES-07857
R6 R7 R24 R28 R42 R46 = SparkFun-Resistors; PROD_ID: RES-00824
R8 R14 R15 R26 R31 R32 R44 R49 R50 = SparkFun-Resistors; PROD_ID: RES-08272
R10 R25 R43 = SparkFun-Resistors; PROD_ID: RES-09383
R11 R16 R23 R34 R41 R52 = SparkFun-Resistors; PROD_ID: RES-07856
R18 R35 R53 = SparkFun-Resistors; PROD_ID: RES-07863
S1 S2 S4 S5 S11 S12 = SparkFun-Switches; PROD_ID: SWCH-14139
S3 S6-S10 S13-S15 = SparkFun-Switches; PROD_ID: SWCH-10651; SF_SKU: COM-10860
U1 U4 U8 U10 U13 U15 = dip_switch
U2 U6 U11 = SparkFun-IC-Power; PROD_ID: IC-09995
U3 U9 U14 = SparkFun-DiscreteSemi; PROD_ID: IC-13538
U5 U7 U12 = SparkFun-IC-Power; PROD_ID: VREG-14094
U$1-U$13 U$15 U$16 U$18-U$21 U$23 U$25-U$43 U$45-U$52 U$54-U$58 U$61 U$63-U$87 U$89-U$96 U$98-U$102 U$105 U$107-U$131 = top
U$14 U$17 U$53 U$59 U$97 U$103 = SparkFun-MicroMod

## Nets
3.3V [POWER]: 3V3_MEAS.2 3V3_MEAS.4 I2C_PU.2 J1.2 J1.74 J5.1 J6.73 J7.36 J7.73 Q2.2 R11.2 R12.2 R13.1 TP2.1 U1.P11
3.3V1 [POWER]: 3V3_MEAS1.2 3V3_MEAS1.4 I2C_PU1.2 J15.2 J15.74 J18.1 J21.73 J22.36 J22.73 Q4.2 R23.2 R29.2 R30.1 TP5.1 U8.P11
3.3V2 [POWER]: 3V3_MEAS2.2 3V3_MEAS2.4 I2C_PU2.2 J27.2 J27.74 J30.1 J33.73 J34.36 J34.73 Q6.2 R41.2 R47.2 R48.1 TP9.1 U13.P11
3.3V_EN: J1.4 VE.1
3.3V_EN1: J15.4 VE1.1
3.3V_EN2: J27.4 VE2.1
3.3V_EN_VE: D1.C R9.1 U5.5 VE.2
3.3V_EN_VE1: D7.C R22.1 U7.5 VE1.2
3.3V_EN_VE2: D14.C R40.1 U12.5 VE2.2
3.3V_QWIIC: C1.1 J2.2 J4.2 R16.2 U4.5
3.3V_QWIIC1: C15.1 J12.2 J14.2 R34.2 U10.5
3.3V_QWIIC2: C24.1 J25.2 J26.2 R52.2 U15.5
3V3_MEAS: 3V3_MEAS.1 3V3_MEAS.3 C6.1 C11.1 U5.1
3V3_MEAS1: 3V3_MEAS1.1 3V3_MEAS1.3 C13.1 C17.1 U7.1
3V3_MEAS2: 3V3_MEAS2.1 3V3_MEAS2.3 C22.1 C26.1 U12.1
5V_MEAS: 5V_MEAS.2 5V_MEAS.4 C5.1 C8.1 R9.2 U5.8
5V_MEAS1: 5V_MEAS1.2 5V_MEAS1.4 C12.1 C14.1 R22.2 U7.8
5V_MEAS2: 5V_MEAS2.2 5V_MEAS2.4 C21.1 C23.1 R40.2 U12.8
!BOOT!: J1.11 J6.66 J7.66 S2.3 S2.4
!BOOT!1: J15.11 J21.66 J22.66 S5.3 S5.4
!BOOT!2: J27.11 J33.66 J34.66 S12.3 S12.4
!CS0!-PROCESSOR: J1.55 J6.49
!CS0!-PROCESSOR1: J15.55 J21.49
!CS0!-PROCESSOR2: J27.55 J33.49
!CS1!-PROC-JUMPER: J7.38 S8.2
!CS1!-PROC-JUMPER1: J22.38 S10.2
!CS1!-PROC-JUMPER2: J34.38 S15.2
!CS1!-PROCESSOR: J1.70 J7.49 S8.1
!CS1!-PROCESSOR1: J15.70 J22.49 S10.1
!CS1!-PROCESSOR2: J27.70 J34.49 S15.1
!DFU-FC0!: J6.10 R13.2 U1.P12
!DFU-FC0!1: J21.10 R30.2 U8.P12
!DFU-FC0!2: J33.10 R48.2 U13.P12
!DFU-FC1!: J7.10 R12.1 U1.P10
!DFU-FC1!1: J22.10 R29.1 U8.P10
!DFU-FC1!2: J34.10 R47.1 U13.P10
!RESET!: J1.6 J5.10 J6.68 J7.68 J13.1 S1.3 S1.4
!RESET!1: J15.6 J18.10 J19.1 J21.68 J22.68 S4.3 S4.4
!RESET!2: J27.6 J30.10 J31.1 J33.68 J34.68 S11.3 S11.4
A0-PROCESSOR: J1.34 J6.38
A0-PROCESSOR1: J15.34 J21.38
A0-PROCESSOR2: J27.34 J33.38
A1-PROCESSOR/!CS1!-ALT: J1.38 S8.3
A1-PROCESSOR/!CS1!-ALT1: J15.38 S10.3
A1-PROCESSOR/!CS1!-ALT2: J27.38 S15.3
CTS1-PROCESSOR: J1.15 J6.16
CTS1-PROCESSOR1: J15.15 J21.16
CTS1-PROCESSOR2: J27.15 J33.16
D0-PROCESSOR: J1.10 J6.47
D0-PROCESSOR1: J15.10 J21.47
D0-PROCESSOR2: J27.10 J33.47
D1-PROCESSOR: J1.18 J7.47
D1-PROCESSOR1: J15.18 J22.47
D1-PROCESSOR2: J27.18 J34.47
D+ [Diff pairs]: J1.3 J3.A6 J3.B6 U3.6
D+1 [Diff pairs]: J15.3 J17.A6 J17.B6 U9.6
D+2 [Diff pairs]: J27.3 J29.A6 J29.B6 U14.6
D- [Diff pairs]: J1.5 J3.A7 J3.B7 U3.4
D-1 [Diff pairs]: J15.5 J17.A7 J17.B7 U9.4
D-2 [Diff pairs]: J27.5 J29.A7 J29.B7 U14.4
G0-PROCESSOR: J1.40 J6.53
G0-PROCESSOR1: J15.40 J21.53
G0-PROCESSOR2: J27.40 J33.53
G1-PROCESSOR: J1.42 J6.55
G1-PROCESSOR1: J15.42 J21.55
G1-PROCESSOR2: J27.42 J33.55
G2-PROCESSOR: J1.44 J6.57
G2-PROCESSOR1: J15.44 J21.57
G2-PROCESSOR2: J27.44 J33.57
G3-PROCESSOR: J1.46 J6.59
G3-PROCESSOR1: J15.46 J21.59
G3-PROCESSOR2: J27.46 J33.59
G4-PROCESSOR/SD_CARD_!CS!: J1.48 J6.61 J10.2
G4-PROCESSOR/SD_CARD_!CS!1: J15.48 J20.2 J21.61
G4-PROCESSOR/SD_CARD_!CS!2: J27.48 J32.2 J33.61
G5-JUMPER: J1.73 S3.2
G5-JUMPER1: J15.73 S6.2
G5-JUMPER2: J27.73 S13.2
G5-PROCESSOR: J7.53 S3.1
G5-PROCESSOR1: J22.53 S6.1
G5-PROCESSOR2: J34.53 S13.1
G6-JUMPER: J1.71 S7.2
G6-JUMPER1: J15.71 S9.2
G6-JUMPER2: J27.71 S14.2
G6-PROCESSOR: J7.55 S7.1
G6-PROCESSOR1: J22.55 S9.1
G6-PROCESSOR2: J34.55 S14.1
G7-PROCESSOR: J1.69 J7.57
G7-PROCESSOR1: J15.69 J22.57
G7-PROCESSOR2: J27.69 J34.57
GND: 3V3_LED.1 5V_LED.1 C1.2 C2.2 C3.2 C4.2 C5.2 C6.2 C7.1 C8.2 C11.2 D1.A DIVIDER.1 H2.1 H3.1 H4.1 H8.1 J1.1 J1.7 J1.33 J1.36 J1.39 J1.45 J1.75 J2.1 J3.GND J3.GND2 J4.1 J5.3 J5.5 J5.9 J6.1 J6.2 J6.8 J6.32 J6.33 J6.34 J6.36 J6.39 J6.45 J6.75 J7.1 J7.2 J7.8 J7.32 J7.33 J7.34 J7.39 J7.45 J7.75 J8.1 J9.1 J10.6 J10.10 J10.11 J10.12 J10.13 J11.1 QWIIC_LED.1 R1.1 R2.1 R3.1 R6.1 R19.2 S1.1 S1.2 S2.1 S2.2 SHLD.1 U1.P5 U2.2 U3.2 U4.2 U5.4 U5.EP
GND1: 3V3_LED1.1 5V_LED1.1 C9.2 C10.2 C12.2 C13.2 C14.2 C15.2 C16.2 C17.2 C18.1 D7.A DIVIDER1.1 H5.1 H6.1 H12.1 H13.1 J12.1 J14.1 J15.1 J15.7 J15.33 J15.36 J15.39 J15.45 J15.75 J16.1 J17.GND J17.GND2 J18.3 J18.5 J18.9 J20.6 J20.10 J20.11 J20.12 J20.13 J21.1 J21.2 J21.8 J21.32 J21.33 J21.34 J21.36 J21.39 J21.45 J21.75 J22.1 J22.2 J22.8 J22.32 J22.33 J22.34 J22.39 J22.45 J22.75 J23.1 J24.1 QWIIC_LED1.1 R20.1 R21.1 R27.1 R28.1 R36.2 S4.1 S4.2 S5.1 S5.2 SHLD1.1 U6.2 U7.4 U7.EP U8.P5 U9.2 U10.2
GND2: 3V3_LED2.1 5V_LED2.1 C19.2 C20.2 C21.2 C22.2 C23.2 C24.2 C25.2 C26.2 C27.1 D14.A DIVIDER2.1 H19.1 H20.1 H25.1 H26.1 J25.1 J26.1 J27.1 J27.7 J27.33 J27.36 J27.39 J27.45 J27.75 J28.1 J29.GND J29.GND2 J30.3 J30.5 J30.9 J32.6 J32.10 J32.11 J32.12 J32.13 J33.1 J33.2 J33.8 J33.32 J33.33 J33.34 J33.36 J33.39 J33.45 J33.75 J34.1 J34.2 J34.8 J34.32 J34.33 J34.34 J34.39 J34.45 J34.75 J35.1 J36.1 QWIIC_LED2.1 R38.1 R39.1 R45.1 R46.1 R54.2 S11.1 S11.2 S12.1 S12.2 SHLD2.1 U11.2 U12.4 U12.EP U13.P5 U14.2 U15.2
HOST_D+ [Diff pairs]: J1.35 J6.35
HOST_D+1 [Diff pairs]: J15.35 J21.35
HOST_D+2 [Diff pairs]: J27.35 J33.35
HOST_D- [Diff pairs]: J1.37 J6.37
HOST_D-1 [Diff pairs]: J15.37 J21.37
HOST_D-2 [Diff pairs]: J27.37 J33.37
I2C_!INT!: J1.16 J6.23 J7.23
I2C_!INT!1: J15.16 J21.23 J22.23
I2C_!INT!2: J27.16 J33.23 J34.23
I2C_SCL: J1.14 J2.4 J4.4 J6.21 J7.21 R15.1
I2C_SCL1: J12.4 J14.4 J15.14 J21.21 J22.21 R32.1
I2C_SCL1-PROCESSOR/QWIIC_EN: J1.53 R4.1 U4.3
I2C_SCL1-PROCESSOR/QWIIC_EN1: J15.53 R33.1 U10.3
I2C_SCL1-PROCESSOR/QWIIC_EN2: J27.53 R51.1 U15.3
I2C_SCL2: J25.4 J26.4 J27.14 J33.21 J34.21 R50.1
I2C_SDA: J1.12 J2.3 J4.3 J6.19 J7.19 R14.1
I2C_SDA1: J12.3 J14.3 J15.12 J21.19 J22.19 R31.1
I2C_SDA1-PROCESSOR/!SD_ENABLE!: J1.51 R18.1
I2C_SDA1-PROCESSOR/!SD_ENABLE!1: J15.51 R35.1
I2C_SDA1-PROCESSOR/!SD_ENABLE!2: J27.51 R53.1
I2C_SDA2: J25.3 J26.3 J27.12 J33.19 J34.19 R49.1
N$1: D4.A R5.2
N$2: 5V_LED.2 D8.C
N$3: D3.A R11.1
N$4: J3.B5 R2.2
N$5: J3.A5 R1.2
N$6: R3.2 U2.5
N$7: DIVIDER.2 R7.1
N$8: D2.C QWIIC_LED.2
N$9: D2.A R16.1
N$10: 3V3_LED.2 D3.C
N$11: I2C_PU.3 R14.2
N$12: D8.A R8.1
N$13: I2C_PU.1 R15.2
N$14: D4.C U2.1
N$15: D6.C U6.1
N$16: C7.2 J10.4 Q2.3
N$17: J17.B5 R21.2
N$18: Q2.1 R18.2 R19.1
N$19: J17.A5 R20.2
N$20: D9.A R23.1
N$21: D11.A R26.1
N$22: 5V_LED1.2 D11.C
N$23: 3V3_LED1.2 D9.C
N$24: I2C_PU1.3 R31.2
N$25: I2C_PU1.1 R32.2
N$26: R27.2 U6.5
N$27: DIVIDER1.2 R24.1
N$28: D12.C QWIIC_LED1.2
N$29: D12.A R34.1
N$30: C18.2 J20.4 Q4.3
N$31: Q4.1 R35.2 R36.1
N$32: D6.A R17.2
N$33: D13.C U11.1
N$34: J29.B5 R39.2
N$35: J29.A5 R38.2
N$36: D15.A R41.1
N$37: D17.A R44.1
N$38: 5V_LED2.2 D17.C
N$39: 3V3_LED2.2 D15.C
N$40: I2C_PU2.3 R49.2
N$41: I2C_PU2.1 R50.2
N$42: R45.2 U11.5
N$43: DIVIDER2.2 R42.1
N$44: D18.C QWIIC_LED2.2
N$45: D18.A R52.1
N$46: C27.2 J32.4 Q6.3
N$47: Q6.1 R53.2 R54.1
N$48: D13.A R37.2
PROCESSOR_CAN-RX: J1.41 J6.43
PROCESSOR_CAN-RX1: J15.41 J21.43
PROCESSOR_CAN-RX2: J27.41 J33.43
PROCESSOR_CAN-TX: J1.43 J6.41
PROCESSOR_CAN-TX1: J15.43 J21.41
PROCESSOR_CAN-TX2: J27.43 J33.41
PWM0-PROCESSOR: J1.32 J6.51
PWM0-PROCESSOR1: J15.32 J21.51
PWM0-PROCESSOR2: J27.32 J33.51
PWM1-PROCESSOR: J1.47 J7.51
PWM1-PROCESSOR1: J15.47 J22.51
PWM1-PROCESSOR2: J27.47 J34.51
RTS1-PROCESSOR: J1.13 J6.18
RTS1-PROCESSOR1: J15.13 J21.18
RTS1-PROCESSOR2: J27.13 J33.18
RX1-DFU_TX-FC0-PLEX: J6.4 U1.P9
RX1-DFU_TX-FC0-PLEX1: J21.4 U8.P9
RX1-DFU_TX-FC0-PLEX2: J33.4 U13.P9
RX1-DFU_TX-FC1-PLEX: J7.4 U1.P8
RX1-DFU_TX-FC1-PLEX1: J22.4 U8.P8
RX1-DFU_TX-FC1-PLEX2: J34.4 U13.P8
RX1-PROCESSOR: J1.19 U1.P6
RX1-PROCESSOR1: J15.19 U8.P6
RX1-PROCESSOR2: J27.19 U13.P6
RX1-PROCESSOR-PLEX: J6.13 U1.P7
RX1-PROCESSOR-PLEX1: J21.13 U8.P7
RX1-PROCESSOR-PLEX2: J33.13 U13.P7
RX2-PROCESSOR: J1.20 J7.13
RX2-PROCESSOR1: J15.20 J22.13
RX2-PROCESSOR2: J27.20 J34.13
SDIO_DATA1/PWR_EN1_ALT: J1.66 J7.71 S7.3
SDIO_DATA1/PWR_EN1_ALT1: J15.66 J22.71 S9.3
SDIO_DATA1/PWR_EN1_ALT2: J27.66 J34.71 S14.3
SDIO_DATA2/PWR_EN0_ALT: J1.68 J6.71 S3.3
SDIO_DATA2/PWR_EN0_ALT1: J15.68 J21.71 S6.3
SDIO_DATA2/PWR_EN0_ALT2: J27.68 J33.71 S13.3
SHLD: J3.SHLD1 J3.SHLD2 J3.SHLD3 J3.SHLD4 SHLD.2
SHLD1: J17.SHLD1 J17.SHLD2 J17.SHLD3 J17.SHLD4 SHLD1.2
SHLD2: J29.SHLD1 J29.SHLD2 J29.SHLD3 J29.SHLD4 SHLD2.2
SPI_PROCESSOR_SCK: J1.57 J6.3 J7.3 J10.5
SPI_PROCESSOR_SCK1: J15.57 J20.5 J21.3 J22.3
SPI_PROCESSOR_SCK2: J27.57 J32.5 J33.3 J34.3
SPI_PROCESSOR_SDI: J1.61 J6.7 J7.7 J10.7
SPI_PROCESSOR_SDI1: J15.61 J20.7 J21.7 J22.7
SPI_PROCESSOR_SDI2: J27.61 J32.7 J33.7 J34.7
SPI_PROCESSOR_SDO: J1.59 J6.5 J7.5 J10.3
SPI_PROCESSOR_SDO1: J15.59 J20.3 J21.5 J22.5
SPI_PROCESSOR_SDO2: J27.59 J32.3 J33.5 J34.5
SPI_SCK1-PROCESSOR: J1.60 J7.61
SPI_SCK1-PROCESSOR1: J15.60 J22.61
SPI_SCK1-PROCESSOR2: J27.60 J34.61
SPI_SDO1-PROCESSOR: J1.62 J7.59
SPI_SDO1-PROCESSOR1: J15.62 J22.59
SPI_SDO1-PROCESSOR2: J27.62 J34.59
SWDCK: J1.21 J5.4
SWDCK1: J15.21 J18.4
SWDCK2: J27.21 J30.4
SWDIO: J1.23 J5.2 TP1.1
SWDIO1: J15.23 J18.2 TP8.1
SWDIO2: J27.23 J30.2 TP12.1
TX1-DFU_RX-FC0-PLEX: J6.6 U1.P1
TX1-DFU_RX-FC0-PLEX1: J21.6 U8.P1
TX1-DFU_RX-FC0-PLEX2: J33.6 U13.P1
TX1-DFU_RX-FC1-PLEX: J7.6 U1.P2
TX1-DFU_RX-FC1-PLEX1: J22.6 U8.P2
TX1-DFU_RX-FC1-PLEX2: J34.6 U13.P2
TX1-PROCESSOR: J1.17 U1.P4
TX1-PROCESSOR1: J15.17 U8.P4
TX1-PROCESSOR2: J27.17 U13.P4
TX1-PROCESSOR-PLEX: J6.15 U1.P3
TX1-PROCESSOR-PLEX1: J21.15 U8.P3
TX1-PROCESSOR-PLEX2: J33.15 U13.P3
TX2-PROCESSOR: J1.22 J7.15
TX2-PROCESSOR1: J15.22 J22.15
TX2-PROCESSOR2: J27.22 J34.15
V_BATT [POWER]: C4.1 J8.2 J11.2 Q1.3 TP3.1 U2.3
V_BATT1 [POWER]: C10.1 J16.2 J24.2 Q3.3 TP6.1 U6.3
V_BATT2 [POWER]: C20.1 J28.2 J36.2 Q5.3 TP10.1 U11.3
V_USB: BYP.1 F2.1 J3.VBUS1 J3.VBUS2 U3.5
V_USB1: BYP1.1 F1.1 J17.VBUS1 J17.VBUS2 U9.5
V_USB2: BYP2.1 F3.1 J29.VBUS1 J29.VBUS2 U14.5
VCC: 5V_MEAS.1 5V_MEAS.3 C2.1 D5.C J6.72 J6.74 J7.72 J7.74 Q1.2 R4.2 U4.1
VCC1: 5V_MEAS1.1 5V_MEAS1.3 C16.1 D10.C J21.72 J21.74 J22.72 J22.74 Q3.2 R33.2 U10.1
VCC2: 5V_MEAS2.1 5V_MEAS2.3 C25.1 D16.C J33.72 J33.74 J34.72 J34.74 Q5.2 R51.2 U15.1
VIN: BYP.2 C3.1 D5.A F2.2 J1.9 Q1.1 R5.1 R6.2 R8.2 R10.2 TP4.1 U2.4
VIN1: BYP1.2 C9.1 D10.A F1.2 J15.9 Q3.1 R17.1 R25.2 R26.2 R28.2 TP7.1 U6.4
VIN2: BYP2.2 C19.1 D16.A F3.2 J27.9 Q5.1 R37.1 R43.2 R44.2 R46.2 TP11.1 U11.4
VIN/1: J15.49 R24.2 R25.1
VIN/2: J27.49 R42.2 R43.1
VIN/3: J1.49 R7.2 R10.1

## Tracks (layer width: path | path; a pad name or v marks a point on that pad's centre or on a via)
3.3V  (via drill 0.3, 0.35)  (5 unrouted)
  Top 0.203: v123.98,21.46 125.35,21.46 126.31,22.43 126.31,25.3 126.66,25.65 J5.1 | J7.36 31.23,19.06 33.02,17.27 v33.02,15.57 | 3V3_MEAS.4 124.59,49.4 R11.2
  Top 0.254: U1.P11 49.69,21.48
  Top 0.559: v115.06,40.39 115.11,40.34 v115.11,21.44 115.11,21.36 111.79,18.03 v108.97,18.03 86.02,18.03 83.87,15.88 v83.87,15.85 | v45.21,18.29 45.21,19.3 47.38,21.48 R13.1 49.69,21.48 R12.2 | v120.55,42.37 121.64,43.46 3V3_MEAS.4 3V3_MEAS.2 | v93.37,55.16 93.4,55.19 101.17,55.19 102.11,56.13 102.11,58.67 103,59.56 103,63.13 102.62,63.52 Q2.2
  Bottom 0.203: v123.98,21.46 115.14,21.46 v115.11,21.44 | TP2.1 126.23,28.21 127.57,26.86 J5.1
  Bottom 0.559: v93.22,40.39 93.22,55.01 v93.37,55.16 93.4,55.19 v94.06,55.19 | v93.22,40.39 v111.61,40.39 v115.06,40.39 118.57,40.39 v120.55,42.37 v121.01,42.82 | 60.55,15.57 45.21,15.57 | 45.21,15.57 v33.02,15.57 22.84,15.57 21.89,16.51 v21.89,16.84 v21.89,17.5 | 45.21,15.57 v45.21,18.29 v45.21,18.9 | 60.55,15.57 60.5,15.62 v60.5,16.81 v61.11,16.81 | I2C_PU.2 v108.97,18.03 | 60.55,15.57 83.59,15.57 v83.87,15.85 84.27,16.26 v84.27,16.31 | v93.22,40.39 v92.61,40.39
  other vias: 112.32,40.39
  pour Top (isolate 0.305, no thermals): 92.8,39.66 92.81,39.63 92.81,38.15 93.45,38.15 93.45,40.87 92.28,40.87 92.28,40.18
  pour Top (isolate 0.305, no thermals): 111.25,38.1 111.76,38.1 111.76,39.35 111.78,39.39 112.57,40.18 112.57,40.89 111.25,40.89
  pour Top (no thermals): 60.5,16.55 60.53,16.56 61.42,16.56 61.42,17.12 60.2,17.12 60.2,15.01 60.48,15.01 60.48,16.51 60.49,16.53
  pour Top (no thermals): 21.83,16.69 21.84,16.66 21.84,15.27 22.1,15.27 22.1,16.66 22.11,16.69 22.13,16.7 22.15,16.71 22.23,16.71 22.23,17.7 21.67,17.7 21.67,16.71 21.79,16.71 21.82,16.7
3.3V1  (via drill 0.3, 0.35)  (5 unrouted)
  Top 0.203: v123.98,99.19 125.35,99.19 126.31,100.15 126.31,103.02 126.66,103.37 J18.1 | J22.36 31.23,96.78 33.02,95 v33.02,93.29 | 3V3_MEAS1.4 124.59,127.13 R23.2
  Top 0.254: U8.P11 49.69,99.2
  Top 0.559: v115.06,118.11 115.11,118.06 v115.11,99.16 115.11,99.09 111.79,95.76 v108.97,95.76 86.02,95.76 83.87,93.61 v83.87,93.58 | v45.21,96.01 45.21,97.03 47.38,99.2 R30.1 49.69,99.2 R29.2 | v120.55,120.09 121.64,121.18 3V3_MEAS1.4 3V3_MEAS1.2 | v93.37,132.89 93.4,132.91 101.17,132.91 102.11,133.86 102.11,136.4 103,137.29 103,140.86 102.62,141.24 Q4.2
  Bottom 0.203: v123.98,99.19 115.14,99.19 v115.11,99.16 | TP5.1 126.23,105.93 127.57,104.58 J18.1
  Bottom 0.559: v93.22,118.11 93.22,132.73 v93.37,132.89 93.4,132.91 v94.06,132.91 | v93.22,118.11 v111.61,118.11 v115.06,118.11 118.57,118.11 v120.55,120.09 v121.01,120.55 | 60.55,93.29 45.21,93.29 | 45.21,93.29 v33.02,93.29 22.84,93.29 21.89,94.23 v21.89,94.56 v21.89,95.23 | 45.21,93.29 v45.21,96.01 v45.21,96.62 | 60.55,93.29 60.5,93.34 v60.5,94.54 v61.11,94.54 | I2C_PU1.2 v108.97,95.76 | 60.55,93.29 83.59,93.29 v83.87,93.58 84.27,93.98 v84.27,94.03 | v93.22,118.11 v92.61,118.11
  other vias: 112.32,118.11
  pour Top (isolate 0.305, no thermals): 92.8,117.39 92.81,117.35 92.81,115.87 93.45,115.87 93.45,118.59 92.28,118.59 92.28,117.91
  pour Top (isolate 0.305, no thermals): 111.25,115.82 111.76,115.82 111.76,117.07 111.78,117.11 112.57,117.91 112.57,118.62 111.25,118.62
  pour Top (no thermals): 60.5,94.28 60.53,94.28 61.42,94.28 61.42,94.84 60.2,94.84 60.2,92.74 60.48,92.74 60.48,94.23 60.49,94.26
  pour Top (no thermals): 21.83,94.41 21.84,94.39 21.84,92.99 22.1,92.99 22.1,94.39 22.11,94.41 22.13,94.43 22.15,94.44 22.23,94.44 22.23,95.43 21.67,95.43 21.67,94.44 21.79,94.44 21.82,94.43
3.3V2  (via drill 0.3, 0.35)  (5 unrouted)
  Top 0.203: v123.98,176.91 125.35,176.91 126.31,177.88 126.31,180.75 126.66,181.1 J30.1 | J34.36 31.23,174.51 33.02,172.72 v33.02,171.02 | 3V3_MEAS2.4 124.59,204.85 R41.2
  Top 0.254: U13.P11 49.69,176.92
  Top 0.559: v115.06,195.83 115.11,195.78 v115.11,176.89 115.11,176.81 111.79,173.48 v108.97,173.48 86.02,173.48 83.87,171.33 v83.87,171.3 | v45.21,173.74 45.21,174.75 47.38,176.92 R48.1 49.69,176.92 R47.2 | v120.55,197.81 121.64,198.91 3V3_MEAS2.4 3V3_MEAS2.2 | v93.37,210.61 93.4,210.64 101.17,210.64 102.11,211.58 102.11,214.12 103,215.01 103,218.58 102.62,218.96 Q6.2
  Bottom 0.203: v123.98,176.91 115.14,176.91 v115.11,176.89 | TP9.1 126.23,183.65 127.57,182.31 J30.1
  Bottom 0.559: v93.22,195.83 93.22,210.46 v93.37,210.61 93.4,210.64 v94.06,210.64 | v93.22,195.83 v111.61,195.83 v115.06,195.83 118.57,195.83 v120.55,197.81 v121.01,198.27 | 60.55,171.02 45.21,171.02 | 45.21,171.02 v33.02,171.02 22.84,171.02 21.89,171.96 v21.89,172.29 v21.89,172.95 | 45.21,171.02 v45.21,173.74 v45.21,174.35 | 60.55,171.02 60.5,171.07 v60.5,172.26 v61.11,172.26 | I2C_PU2.2 v108.97,173.48 | 60.55,171.02 83.59,171.02 v83.87,171.3 84.27,171.71 v84.27,171.76 | v93.22,195.83 v92.61,195.83
  other vias: 112.32,195.83
  pour Top (isolate 0.305, no thermals): 92.8,195.11 92.81,195.08 92.81,193.6 93.45,193.6 93.45,196.32 92.28,196.32 92.28,195.63
  pour Top (isolate 0.305, no thermals): 111.25,193.55 111.76,193.55 111.76,194.8 111.78,194.83 112.57,195.63 112.57,196.34 111.25,196.34
  pour Top (no thermals): 60.5,172 60.53,172.01 61.42,172.01 61.42,172.57 60.2,172.57 60.2,170.46 60.48,170.46 60.48,171.96 60.49,171.98
  pour Top (no thermals): 21.83,172.13 21.84,172.11 21.84,170.71 22.1,170.71 22.1,172.11 22.11,172.13 22.13,172.15 22.15,172.16 22.23,172.16 22.23,173.15 21.67,173.15 21.67,172.16 21.79,172.16 21.82,172.15
3.3V_EN  (via drill 0.3)
  Top 0.203: J1.4 110.86,41.14 111.44,41.72 111.44,48.63 112.27,49.45 v112.67,49.45
  Bottom 0.203: VE.1 123.47,50.06 122.86,49.45 v112.67,49.45
3.3V_EN1  (via drill 0.3)
  Top 0.203: J15.4 110.86,118.86 111.44,119.44 111.44,126.35 112.27,127.18 v112.67,127.18
  Bottom 0.203: VE1.1 123.47,127.79 122.86,127.18 v112.67,127.18
3.3V_EN2  (via drill 0.3)
  Top 0.203: J27.4 110.86,196.59 111.44,197.17 111.44,204.08 112.27,204.9 v112.67,204.9
  Bottom 0.203: VE2.1 123.47,205.51 122.86,204.9 v112.67,204.9
3.3V_EN_VE  (via drill 0.3)
  Top 0.203: U5.5 120.84,55.63 123.06,55.63 v123.44,55.25 | D1.C 127.09,53.26 R9.1 127.93,54.7 v128.4,54.23
  Bottom 0.203: v123.44,55.25 123.47,55.22 VE.2 v128.4,54.23
3.3V_EN_VE1  (via drill 0.3)
  Top 0.203: U7.5 120.84,133.35 123.06,133.35 v123.44,132.97 | D7.C 127.09,130.98 R22.1 127.93,132.42 v128.4,131.95
  Bottom 0.203: v123.44,132.97 123.47,132.94 VE1.2 v128.4,131.95
3.3V_EN_VE2  (via drill 0.3)
  Top 0.203: U12.5 120.84,211.07 123.06,211.07 v123.44,210.69 | D14.C 127.09,208.71 R40.1 127.93,210.14 v128.4,209.68
  Bottom 0.203: v123.44,210.69 123.47,210.67 VE2.2 v128.4,209.68
3.3V_QWIIC  (via drill 0.3)
  Top 0.203: R16.2 126.24,51.89 v126.24,63.12
  Top 0.559: J4.2 93.72,74.43 J2.2 93.7,71.4 93.89,71.21 v93.89,68.83 C1.1 94.05,67.16 U4.5
  Bottom 0.203: v126.24,63.12 94.36,63.12 93.89,63.59 v93.89,68.83
3.3V_QWIIC1  (via drill 0.3)
  Top 0.203: R34.2 126.24,129.61 v126.24,140.84
  Top 0.559: J14.2 93.72,152.16 J12.2 93.7,149.13 93.89,148.93 v93.89,146.56 C15.1 94.05,144.88 U10.5
  Bottom 0.203: v126.24,140.84 94.36,140.84 93.89,141.31 v93.89,146.56
3.3V_QWIIC2  (via drill 0.3)
  Top 0.203: R52.2 126.24,207.34 v126.24,218.57
  Top 0.559: J26.2 93.72,229.88 J25.2 93.7,226.85 93.89,226.66 v93.89,224.28 C24.1 94.05,222.6 U15.5
  Bottom 0.203: v126.24,218.57 94.36,218.57 93.89,219.04 v93.89,224.28
3V3_MEAS  (4 unrouted)
  pour Top (no thermals): 118.24,53.21 118.24,46.1 118.75,45.59 119.51,45.59 120.02,46.1 120.02,51.94 119.76,52.2 119.25,52.2 119,52.45 119,53.21
3V3_MEAS1  (4 unrouted)
  pour Top (no thermals): 118.24,130.94 118.24,123.83 118.75,123.32 119.51,123.32 120.02,123.83 120.02,129.67 119.76,129.92 119.25,129.92 119,130.17 119,130.94
3V3_MEAS2  (4 unrouted)
  pour Top (no thermals): 118.24,208.66 118.24,201.55 118.75,201.04 119.51,201.04 120.02,201.55 120.02,207.39 119.76,207.64 119.25,207.64 119,207.9 119,208.66
5V_MEAS  (4 unrouted)
  Top 0.203: C5.1 119.47,57.05 120.2,56.32 123.76,56.32 R9.2
  pour Top (no thermals): 118.75,55.37 118.75,60.33 118.24,60.83 118.24,61.59 118.75,62.1 119.63,62.1 120.14,61.59 120.14,56.64 119.76,56.26 119.25,56.26 119,56.01 119,55.37
5V_MEAS1  (4 unrouted)
  Top 0.203: C12.1 119.47,134.77 120.2,134.04 123.76,134.04 R22.2
  pour Top (no thermals): 118.75,133.1 118.75,138.05 118.24,138.56 118.24,139.32 118.75,139.83 119.63,139.83 120.14,139.32 120.14,134.37 119.76,133.98 119.25,133.98 119,133.73 119,133.1
5V_MEAS2  (4 unrouted)
  Top 0.203: C21.1 119.47,212.5 120.2,211.77 123.76,211.77 R40.2
  pour Top (no thermals): 118.75,210.82 118.75,215.77 118.24,216.28 118.24,217.04 118.75,217.55 119.63,217.55 120.14,217.04 120.14,212.09 119.76,211.71 119.25,211.71 119,211.45 119,210.82
!BOOT!  (via drill 0.3)
  Top 0.203: S2.4 S2.3 124.18,38.96 v123.04,38.96 | v109.22,33.73 109.09,33.6 109.09,31.32 J1.11 109.11,27.67 109.22,27.57 v109.22,25.53 | v102.08,25.63 101.91,25.79 75.68,25.79 v75.59,25.7 | v69.8,25.68 69.67,25.81 65.02,25.81 | J6.66 62.09,24.85 63.04,25.81 65.02,25.81 | J7.66 23.73,26.76 29.64,32.66 v46.57,32.66 | v60.55,32.59 60.55,27.96 v60.58,27.94 | v65.02,27.94 65.02,25.81
  Bottom 0.203: v109.22,33.73 110.87,35.38 119.46,35.38 v123.04,38.96 | v109.22,25.53 102.23,25.53 102.11,25.65 v102.08,25.63 | v69.8,25.68 69.8,25.7 69.83,25.73 75.56,25.73 v75.59,25.7 | v60.58,27.94 v65.02,27.94 | v46.57,32.66 46.78,32.66 46.86,32.59 v60.55,32.59
!BOOT!1  (via drill 0.3)